# Altium PCB Copy of PCB2.PcbDoc
Units mm, origin at the board's own origin, x right, y up, seen from the top; angles counter-clockwise.
Board outline 152.4 x 101.6 mm, 2 copper layers (Top Layer, Bottom Layer); 20 components, 21 nets, 103 pads, 8 vias.
Unrouted connection lines stored in the file: 20.
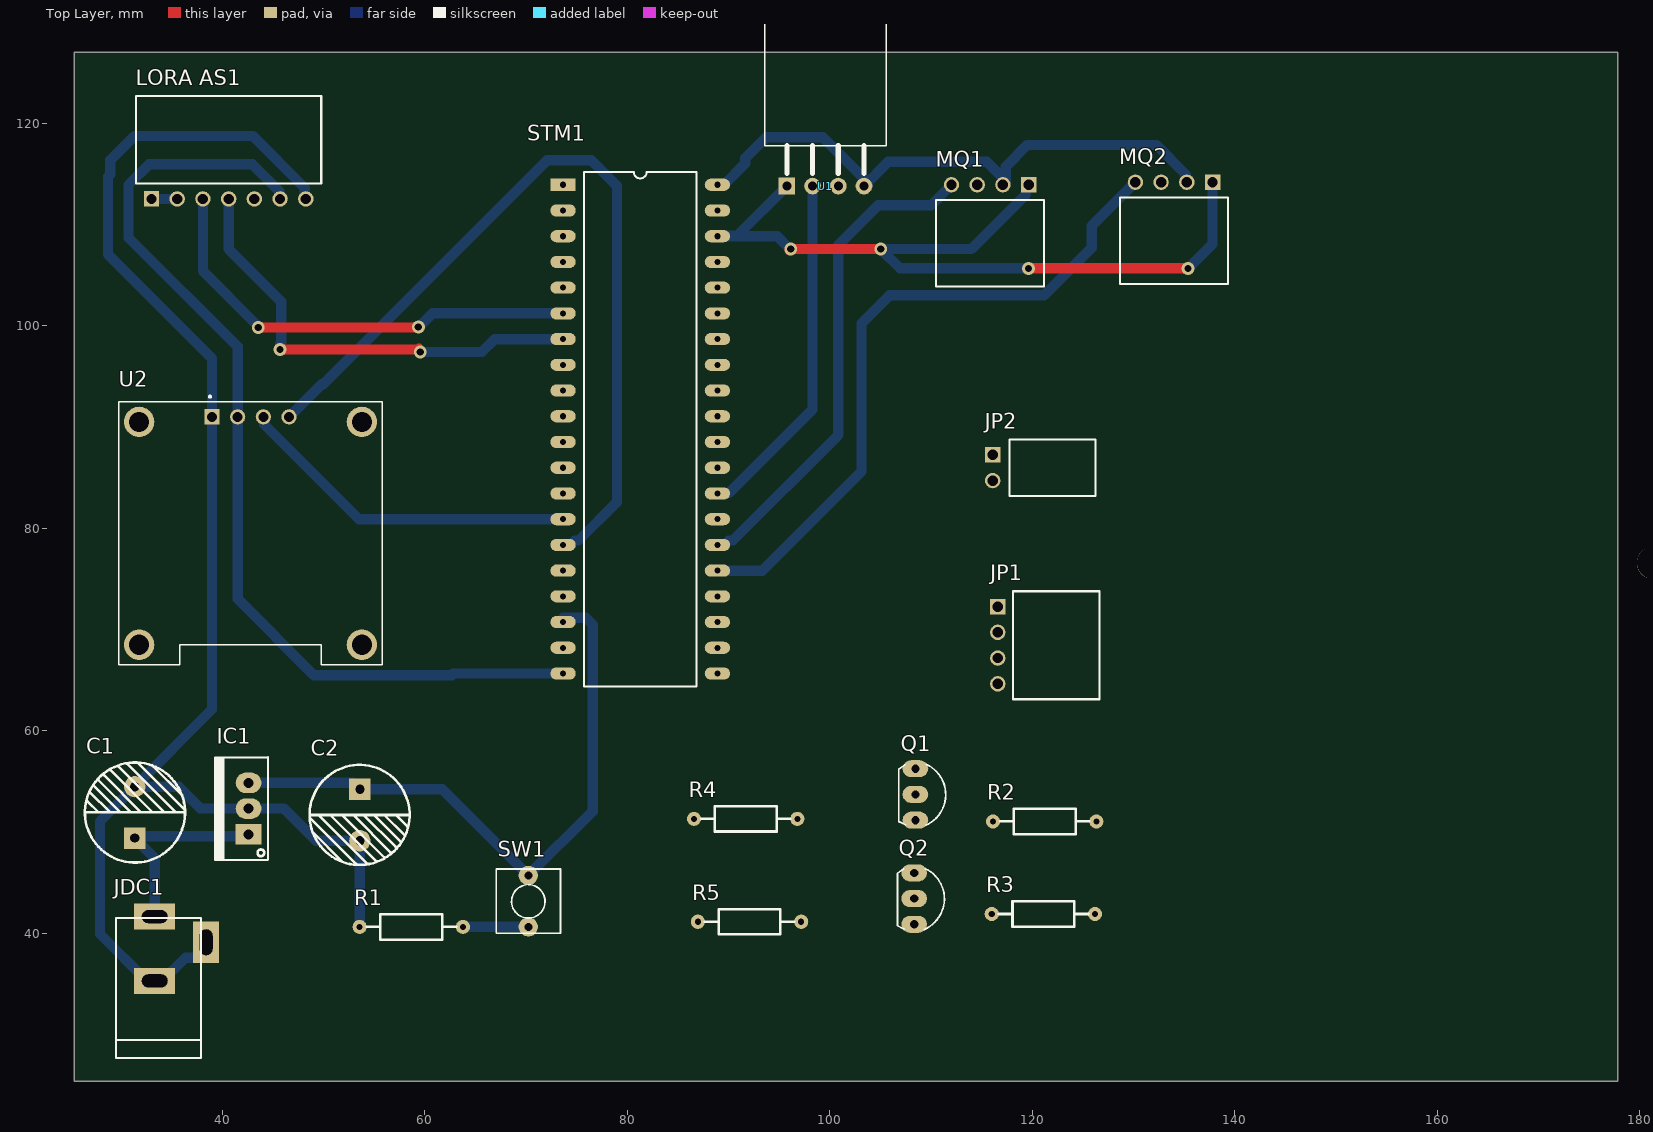
[diagram p0: Top Layer view]
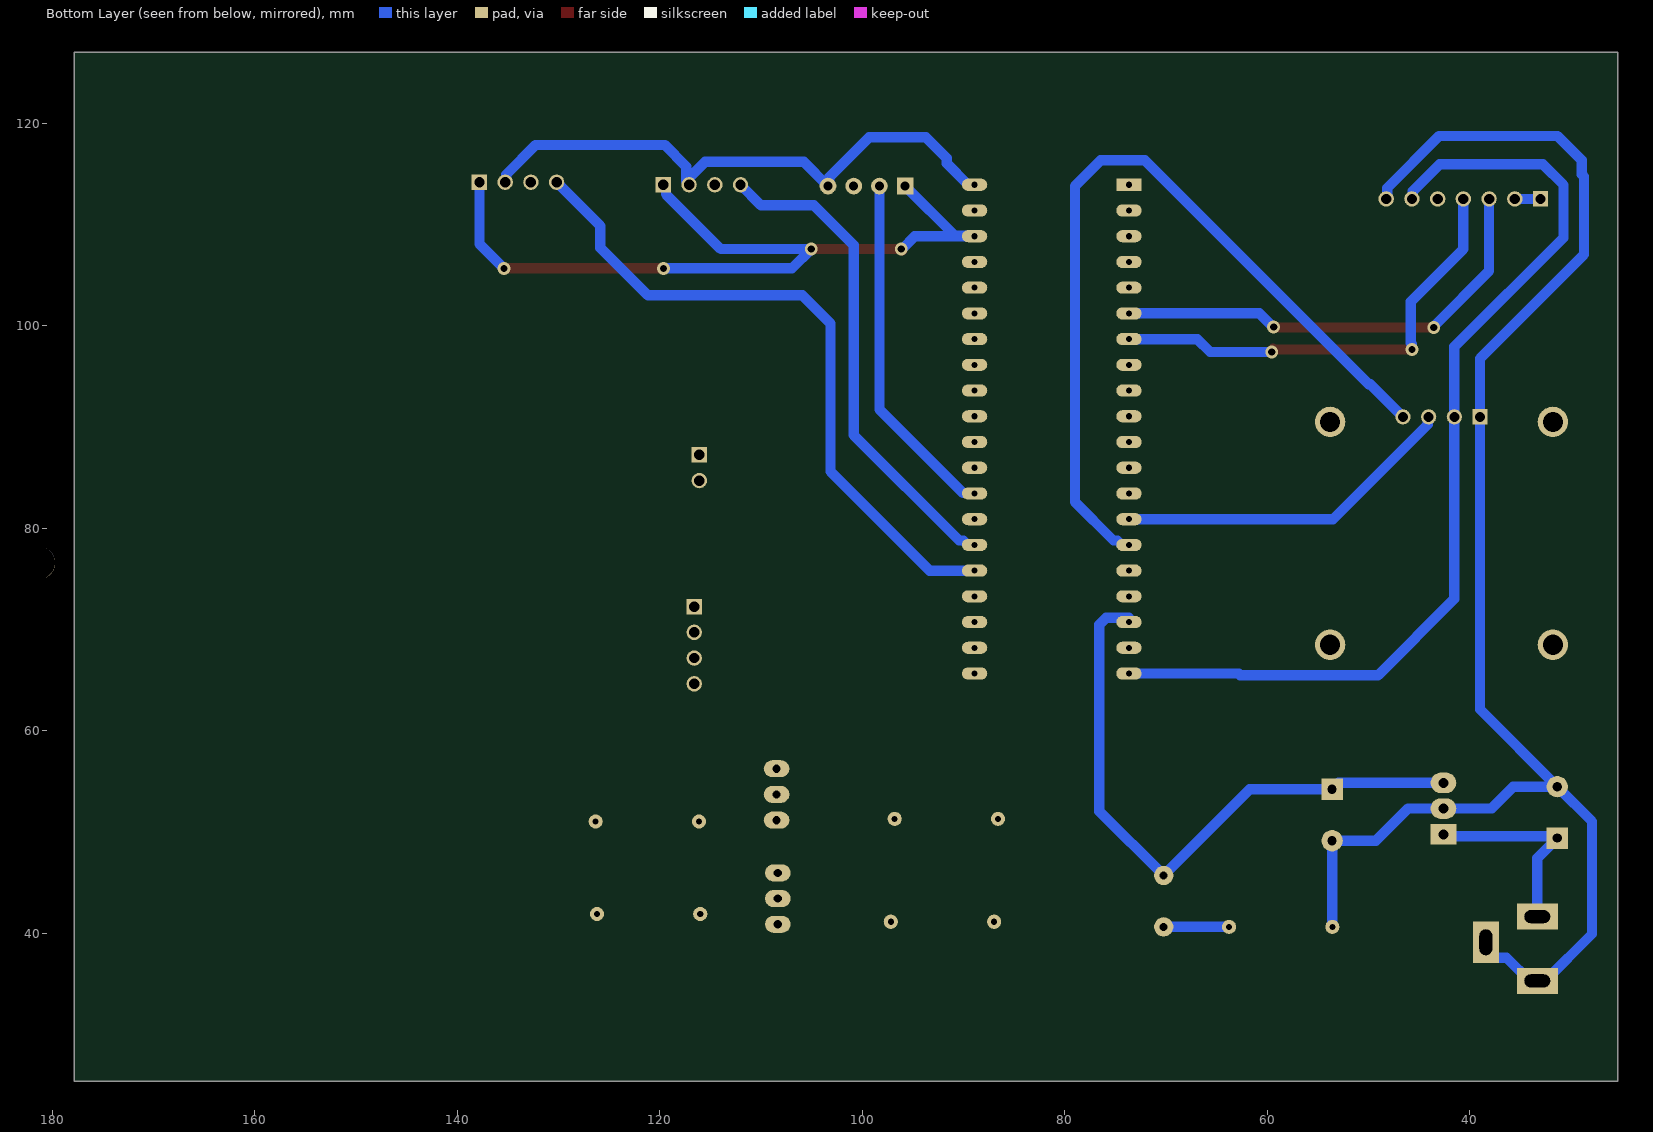
[diagram p1: Bottom Layer view, seen from below]

## Layer stack, top to bottom
Top Solder: solder mask 0.0102, Solder Resist, Dk 3.5
Top Layer: signal copper 0.0356
Dielectric 1: dielectric 0.32, FR-4, Dk 4.8
Bottom Layer: signal copper 0.0356
Bottom Solder: solder mask 0.0102, Solder Resist, Dk 3.5

## Board outline
25.4,25.4 177.8,25.4 177.8,127 25.4,127

## Design rules (kind name [scope] priority, off if disabled: settings)
Clearance [All] p1: gap=1 ignorepadtopadclearanceinfootprint=FALSE
PolygonConnect [All] p1: connectstyle=Relief reliefconductorwidth=0.254 reliefentries=4 polygonreliefangle="90 Angle" airgapwidth=0.254
RoutingVias [All] p1: holewidth=0.711 width=1.27 viastyle="Through Hole" minholewidth=0.711 minwidth=1.27 maxholewidth=0.711 maxwidth=1.27
SolderMaskExpansion [All] p1: expansion=0.102 istentingtop=FALSE
Width [All] p1: maxlimit=1.016 minlimit=0.254 preferedwidth=1.016
30 further rules are at their usual default settings.

## Classes and differential pairs
component class Schematic: IC1 JDC1 JP1 JP2 MQ1 MQ2 Q1 Q2 R3 R4 R5 STM1 SW1 U1 U2

## Components (designator, comment, footprint, x,y, rotation, side; value= is the part's Value field where it differs from the comment)
C1 "100uF" "Tu hoa 10mm" 31.369,51.943 r90 top
C2 "100uF" "Tu hoa 10mm" 53.594,51.689 r270 top
IC1 "LM7805" QTO-220 42.606,49.784 r90 top
JDC1 "Jac DC" DC-IN 35.875,38.481 r90 top
JP1 "JP 1x4 2.54" "JP 1x4 CC" 116.586,68.453 r270 top
JP2 "JP 1x2 2.54" "JP 1x2 CC" 116.078,87.249 r270 top
"LORA AS1" "JP7" JP7-C1C 40.64,112.522 r0 top
MQ1 "MQ7" "JP 1x4 CC" 115.824,113.919 r180 top
MQ2 "MQ135" "JP 1x4 CC" 133.985,114.173 r180 top
Q1 "C1815" TO92 108.458,53.721 r270 top value=C9014
Q2 "C1815" TO92 108.331,43.434 r270 top value=C9014
R1 "3.9k" "tro vach 1/4w" 58.674,40.64 r0 top
R2 "1k" "tro vach 1/4w" 121.219,51.054 r0 top
R3 "1k" "tro vach 1/4w" 121.092,41.91 r0 top
R4 "1k" "tro vach 1/4w" 91.694,51.308 r0 top
R5 "1k" "tro vach 1/4w" 92.075,41.148 r0 top
STM1 "KIT STM32F103C8T6" "STM32F103 KIT" 73.66,113.919 r0 top
SW1 "SW" SW2 70.231,40.64 r90 top value="SW chip 2 pin"
U1 "TEM-HUM-DHT11(4P-15.5X12.0MM)" SNR4-2.54-15.5X12.0X5.5MM 99.568,125.542 r90 top
U2 "DM-OLED096-636" MODULE_DM-OLED096-636 42.799,79.502 r0 top

## Footprints (in the part's own frame and the unit in brackets; to place one, negate y for a bottom-side part, rotate by r counter-clockwise, add the part's x,y. Pads: shape width x height; smd on the part's side, far side on the other; paste and mask are expansions set on the pad)
DC-IN [mil] "Jac DC input"
  rect 100x160 hole 50 slot 100 at 90 deg: 1(125,100) 2(-125,100)
  rect 160x100 hole 50 slot 100 at 0 deg: 3(25,-100)
  silkscreen extent -425,-80 120,250, body extent -410,-105 134,269, height 434
JP7-C1C [mm] "07p 1 row Right angle"
  rect 1.52x1.52 hole 1.02: 1(-7.62,0)
  round 1.52 hole 1.02: 2(-5.08,0) 3(-2.54,0) 4(0,0) 5(2.54,0) 6(5.08,0) 7(7.62,0)
  silkscreen extent -9.14,1.52 9.14,10.17, body extent -9.14,-0.25 9.14,10.05, height 2.51
"JP 1x2 CC" [mm] "JP 1x2 CC"
  rect 1.52x1.52 hole 1.02: 1(0,0)
  round 1.52 hole 1.02: 2(2.54,0)
  silkscreen extent -1.52,1.65 4.06,10.17, body extent -1.52,-0.13 4.06,10.17, height 2.51
"JP 1x4 CC" [mm]
  rect 1.52x1.52 hole 1.02: 1(-3.81,0)
  round 1.52 hole 1.02: 2(-1.27,0) 3(1.27,0) 4(3.81,0)
  silkscreen extent -5.33,1.52 5.33,10.03, body extent -5.33,-0.25 5.33,10.05, height 2.51
MODULE_DM-OLED096-636 [mm]
  rect 1.508x1.508 / inner round 1.508 / far side rect 1.508x1.508 hole 1: 1(-3.81,11.5)
  round 1.508 hole 1: 2(-1.27,11.5) 3(1.27,11.5) 4(3.81,11.5)
  round 3 hole 2: S1(-11,11) S2(11,11) S3(11,-11) S4(-11,-11)
  silkscreen extent -13,-13 13,13.6, body extent -13,-13 13,13, height 5.66
QTO-220 [mil] "TO-220 - 1-2-3"
  rect 80x100 hole 39: 1(0,0)
  oval 80x100 hole 39: 2(100,0) 3(200,0)
  silkscreen extent -100,-76 300,130, body extent -119,-64 322,121, height 755
SNR4-2.54-15.5X12.0X5.5MM [mil]
  rect 65x65 hole 35: 1(-462.6,150)
  round 65 hole 35: 2(-462.6,50) 3(-462.6,-50) 4(-462.6,-150)
  silkscreen extent -413,-236 305,236
"STM32F103 KIT" [mm]
  rect 2.5x1.2 hole 0.6: 1(0,0)
  oval 2.5x1.2 hole 0.6: 2(0,-2.54) 3(0,-5.08) 4(0,-7.62) 5(0,-10.16) 6(0,-12.7) 7(0,-15.24) 8(0,-17.78) 9(0,-20.32) 10(0,-22.86) 11(0,-25.4) 12(0,-27.94) 13(0,-30.48) 14(0,-33.02) 15(0,-35.56) 16(0,-38.1) 17(0,-40.64) 18(0,-43.18) 19(0,-45.72) 20(0,-48.26) 21(15.24,-48.26) 22(15.24,-45.72) 23(15.24,-43.18) 24(15.24,-40.64) 25(15.24,-38.1) 26(15.24,-35.56) 27(15.24,-33.02) 28(15.24,-30.48) 29(15.24,-27.94) 30(15.24,-25.4) 31(15.24,-22.86) 32(15.24,-20.32) 33(15.24,-17.78) 34(15.24,-15.24) 35(15.24,-12.7) 36(15.24,-10.16) 37(15.24,-7.62) 38(15.24,-5.08) 39(15.24,-2.54) 40(15.24,0)
  silkscreen extent 2.08,-49.53 13.16,1.27, body extent -3.81,-53.97 19.05,3.59, height 16.12
SW2 [mil] "SW button 2pin, 250x 250 mil"
  round 75 hole 31: 1(0,0) 2(200,0)
  silkscreen extent -25,-125 225,125
TO92 [mil] "TO-92"
  oval 66x100 hole 32: 1(-100,0) 2(0,0) 3(100,0)
  silkscreen extent -117,-65 120,118, body extent -109,-66 109,95, height 245
"tro vach 1/4w" [mm]
  round 1.4 hole 0.6: 1(-5.1,0) 2(5.1,0)
  silkscreen extent -4.39,-1.25 4.42,1.25, body extent -5.38,-1.2 5.38,1.2, height 2.41
"Tu hoa 10mm" [mm]
  rect 2.1x2.1 hole 0.9: 1(-2.54,0)
  round 2.1 hole 0.9: 2(2.54,0)
  silkscreen extent -4.95,-4.96 4.93,4.92, body extent -5,-5 4.97,5, height 20.01

## Part data
C1 C2: library part "Tu Hoa 100uF 100V 10x20", "Cắm", Chung_Loai=Cắm, Don_Vi=Con, Ma_Hang=MH003150, So_Chan=2, Ten_Linh_Kien="Tụ Hóa 100uF 100V 10x20MM"
IC1: library part LM78xx, "On ap +, from + 5 to + 24VDC"
JDC1: library part DCIN, "Jac DC input"
JP1 MQ1 MQ2: library part "JP 1x4 2.54 Cai Cong", "Cắm", Chung_Loai=Cắm, Don_Vi=Con, Ma_Hang=MH001265, Ten_Linh_Kien="Jump Đơn Cái 2.54MM 1x40P Cong"
JP2: library part "JP 1x2 2.54 Cai Cong", "Cắm", Chung_Loai=Cắm, Don_Vi=Con, Ma_Hang=MH001265, Ten_Linh_Kien="Jump Đơn Cái 2.54MM 1x40P Cong"
"LORA AS1": "WR-PHD 2.54 mm Angled Socket Header", Manufacturer="W¨¹rth Elektronik eiSos GmbH", partNo=613007143121, ComponentLink1 Description=Manufacturer, ComponentLink1URL=http://www.we-online.com, ComponentLink2 Description=Datasheet, ComponentLink2URL=http://katalog.we-online.de/em/datasheet/6130xx143121.pdf, Created by="Karrer Zheng", Created Date="29 March 2013", NoPins=07
Q1 Q2: library part "Trans C1815 DIP", "NPN transistor"
R1: library part "Tro Vach 1/4W 5% 9.1k", "Cắm", Chung_Loai=Cắm, Don_Vi=Con, Ma_Hang=MH008787, So_Chan=2, Ten_Linh_Kien="Trở Vạch 1/4w 5% 9.1k"
R2 R3 R4 R5: library part "Tro Vach 1/4W 5% 1k", "Cắm", Chung_Loai=Cắm, Don_Vi=Con, Ma_Hang=MH007390, So_Chan=2, Ten_Linh_Kien="Trở Vạch 1/4w 5% 1k"
STM1: library part "STM32f103 Bluepill", "KIT STM32F103C8T6 Bluepill"
SW1: library part SW2, "Switch button 2 pin"
U1: "Servo AC 100 ~ 120VAC Supply 10A 120V Load", Package=None, Availability="In Stock", Check_prices=https://www.snapeda.com/parts/DHT11/Panasonic/view-part/6618018/?ref=eda, MF="Panasonic Industrial Automation Sales", MP=DHT11, Price=None, Purchase-URL=https://pricing.snapeda.com/search/part/DHT11/?ref=eda, SnapEDA_Link=https://www.snapeda.com/parts/DHT11/Panasonic/view-part/6618018/?ref=snap
U2: "0.96â€ 128 X 64 MONOCHROME GRAPHIC OLED DISPLAY MODULE - I2C", Package=Package, Check_prices=https://www.snapeda.com/parts/DM-OLED096-636/Display+Module/view-part/?ref=eda, MF="Display Module", MP=DM-OLED096-636, SnapEDA_Link=https://www.snapeda.com/parts/DM-OLED096-636/Display+Module/view-part/?ref=snap

## Free pads (board coordinates)
  round 3.2 hole 3.2: 2(181.295,76.581) 4(181.295,76.581)

## Via types
v1: diameter 1.27, hole 0.711, Top Layer to Bottom Layer, 8 vias

## Nets (pads, with @x,y where several pads share a name; then routed paths per layer and width w, separated by ;. In a path a pad name is that pad's centre, name@x,y a point inside that pad or via, vN(x,y) a via of type N, cw(c..) or ccw(c..) an arc to the next point about the centre after c; other vN are vias at no path point)
+5: C2.1 IC1.3 JP1.4 R2.2 R3.2 STM1.18 SW1.2 | length 62
  Bottom Layer w1.016: IC1.3 52.959,54.864 C2.1 61.722,54.229 SW1.2 76.581,52.07 76.581,70.485 75.895,71.171 STM1.18@73.66,71.171
GND: "LORA AS1.1" "LORA AS1.2" "LORA AS1.7" C1.2 C2.2 IC1.2 JDC1.2 JDC1.3 JP1.1 MQ1.2 MQ2.2 Q1.1 Q2.1 R1.1 STM1.19 STM1.40 U1.4 U2.1 | length 215.9
  Bottom Layer w1.016: 33.02,112.522 35.56,112.522 ; JDC1.3 38.415,38.354 37.653,37.592 36.383,37.592 34.097,35.306 JDC1.2 32.573,35.306 27.94,39.939 27.94,51.054 C1.2 ; 48.26,112.522 48.164,112.618 48.164,113.597 43.015,118.745 31.369,118.745 28.956,116.332 28.956,114.962 28.736,114.742 28.736,107.027 38.989,96.774 U2.1 38.989,62.103 C1.2 ; R1.1 53.584,40.65 53.584,49.139 C2.2 49.276,49.149 46.085,52.34 37.844,52.34 35.701,54.483 C1.2 ; STM1.40 89.55,113.919 91.656,116.025 91.656,116.548 93.726,118.618 99.312,118.618 103.256,114.674 103.256,113.914 U1.4 105.773,116.187 115.493,116.187 MQ1.2@117.366,114.314 ; MQ1.2@117.197,114.145 117.19,114.152 117.366,114.327 117.366,115.715 119.507,117.856 132.239,117.856 135.159,114.937 135.159,114.269 MQ2.2
NetC1_1: C1.1 IC1.1 JDC1.1 | length 20
  Bottom Layer w1.016: JDC1.1 33.335,47.437 C1.1 31.559,49.593 42.416,49.593 IC1.1
NetJP1_2: JP1.2 Q1.2 R2.1
NetJP1_3: JP1.3 Q2.2 R3.1
NetJP2_1: JP2.1 STM1.24
NetJP2_2: JP2.2 STM1.23
"NetLORA AS1_3": "LORA AS1.3" STM1.6 | length 45.4
  Top Layer w1.016: v1(43.561,99.822) 59.309,99.822 v1(59.372,99.885) v1@59.436,99.949
  Bottom Layer w1.016: 38.1,112.522 38.1,105.41 v1@43.434,100.076 ; v1(59.372,99.885) 59.441,99.885 60.775,101.219 STM1.6
"NetLORA AS1_4": "LORA AS1.4" STM1.7 | length 44.9
  Top Layer w1.016: v1(45.72,97.663) 59.357,97.663 v1@59.436,97.742
  Bottom Layer w1.016: 40.64,112.522 40.64,107.569 45.847,102.362 45.847,98.298 v1@45.72,98.171 ; v1(59.563,97.409) 65.643,97.409 66.913,98.679 STM1.7
"NetLORA AS1_6": "LORA AS1.6" MQ1.1 MQ2.1 STM1.20 STM1.38 U1.1 U2.2 | length 182.3
  Top Layer w1.016: v1@96.012,107.442 v1(96.139,107.569) v1(105.029,107.569) ; v1(119.634,105.664) v1(135.382,105.664)
  Bottom Layer w1.016: 45.72,112.522 45.624,112.618 45.624,113.286 42.958,115.951 32.796,115.951 30.752,113.907 30.752,108.694 41.529,97.917 U2.2 41.529,73.025 49.06,65.494 62.657,65.494 62.822,65.659 STM1.20 ; U1.1 90.84,108.874 88.935,108.874 STM1.38 94.8,108.839 96.07,107.569 v1(96.139,107.569) ; v1(119.634,105.664) 106.934,105.664 v1(105.029,107.569) 113.951,107.569 119.382,113 119.382,113.667 MQ1.1 ; v1(135.382,105.664) 137.795,108.077 MQ2.1
NetMQ1_4: MQ1.4 STM1.26 | length 48.8
  Bottom Layer w1.016: STM1.26 89.6,78.359 90.032,78.791 90.423,78.791 100.838,89.206 100.838,107.95 104.791,111.903 109.998,111.903 MQ1.4
NetMQ2_4: MQ2.4 STM1.25 | length 67
  Bottom Layer w1.016: STM1.25 93.345,75.819 103.124,85.598 103.124,100.203 105.918,102.997 121.158,102.997 125.857,107.696 125.857,109.855 MQ2.4
NetQ1_3: Q1.3 R4.2
NetQ2_3: Q2.3 R5.2
NetR1_2: R1.2 SW1.1 | length 6.5
  Bottom Layer w1.016: R1.2 SW1.1
NetR4_1: R4.1 STM1.12
NetR5_1: R5.1 STM1.13
NetSTM1_14: STM1.14 U2.3 | length 34.2
  Bottom Layer w1.016: U2.3 44.163,90.908 44.163,90.249 53.513,80.899 STM1.14
NetSTM1_15: STM1.15 U2.4 | length 82.2
  Bottom Layer w1.016: U2.4 49.841,94.234 49.992,94.234 72.09,116.332 76.454,116.332 78.994,113.792 78.994,82.602 75.183,78.791 74.792,78.791 74.36,78.359 STM1.15
NetSTM1_28: STM1.28 U1.2 | length 34.9
  Bottom Layer w1.016: STM1.28 88.935,83.474 90.026,83.474 98.298,91.746 U1.2
"":  | length 1090.2
  Bottom Layer w1.016: 272.923,0 1363.091,0
pads on no net: "LORA AS1.5" MQ1.3 MQ2.3 STM1.1 STM1.2 STM1.3 STM1.4 STM1.5 STM1.8 STM1.9 STM1.10 STM1.11 STM1.16 STM1.17 STM1.21 STM1.22 STM1.27 STM1.29 STM1.30 STM1.31 STM1.32 STM1.33 STM1.34 STM1.35 STM1.36 STM1.37 STM1.39 U1.3 U2.S1 U2.S2 U2.S3 U2.S4